# Altium PCB SiPM_Array_v3.PcbDoc
Units mm, origin at the board's own origin, x right, y up, seen from the top; angles counter-clockwise.
Board outline 25 x 28.2 mm, 2 copper layers (Top Layer, Bottom Layer); 15 components, 7 nets, 77 pads, 5 vias.
Unrouted connection lines stored in the file: 1.
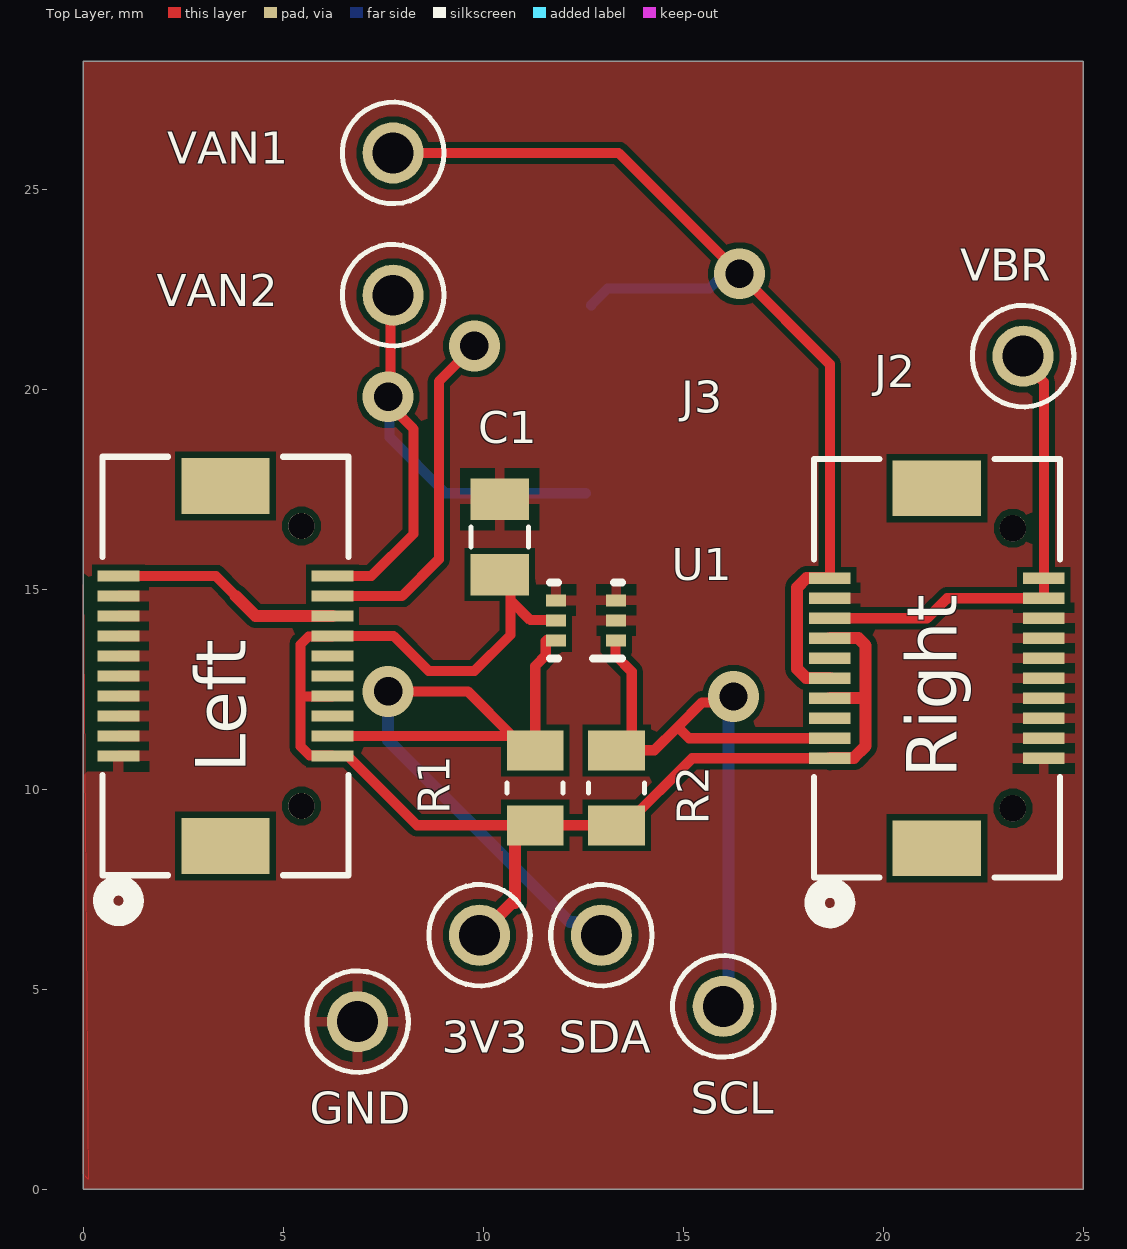
[diagram p0: Top Layer view]
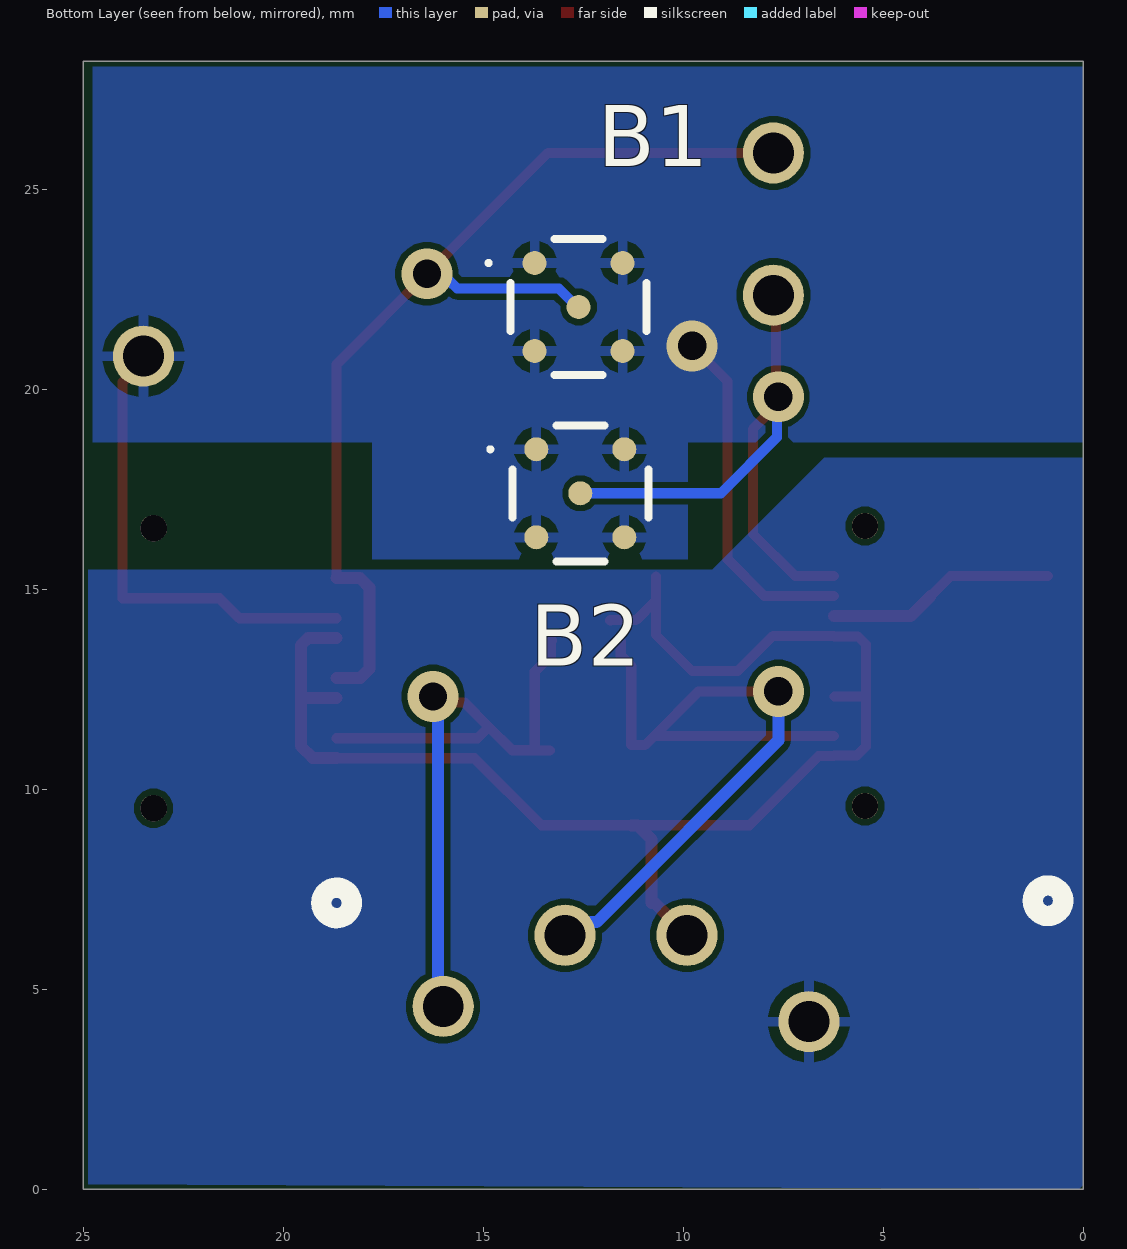
[diagram p1: Bottom Layer view, seen from below]
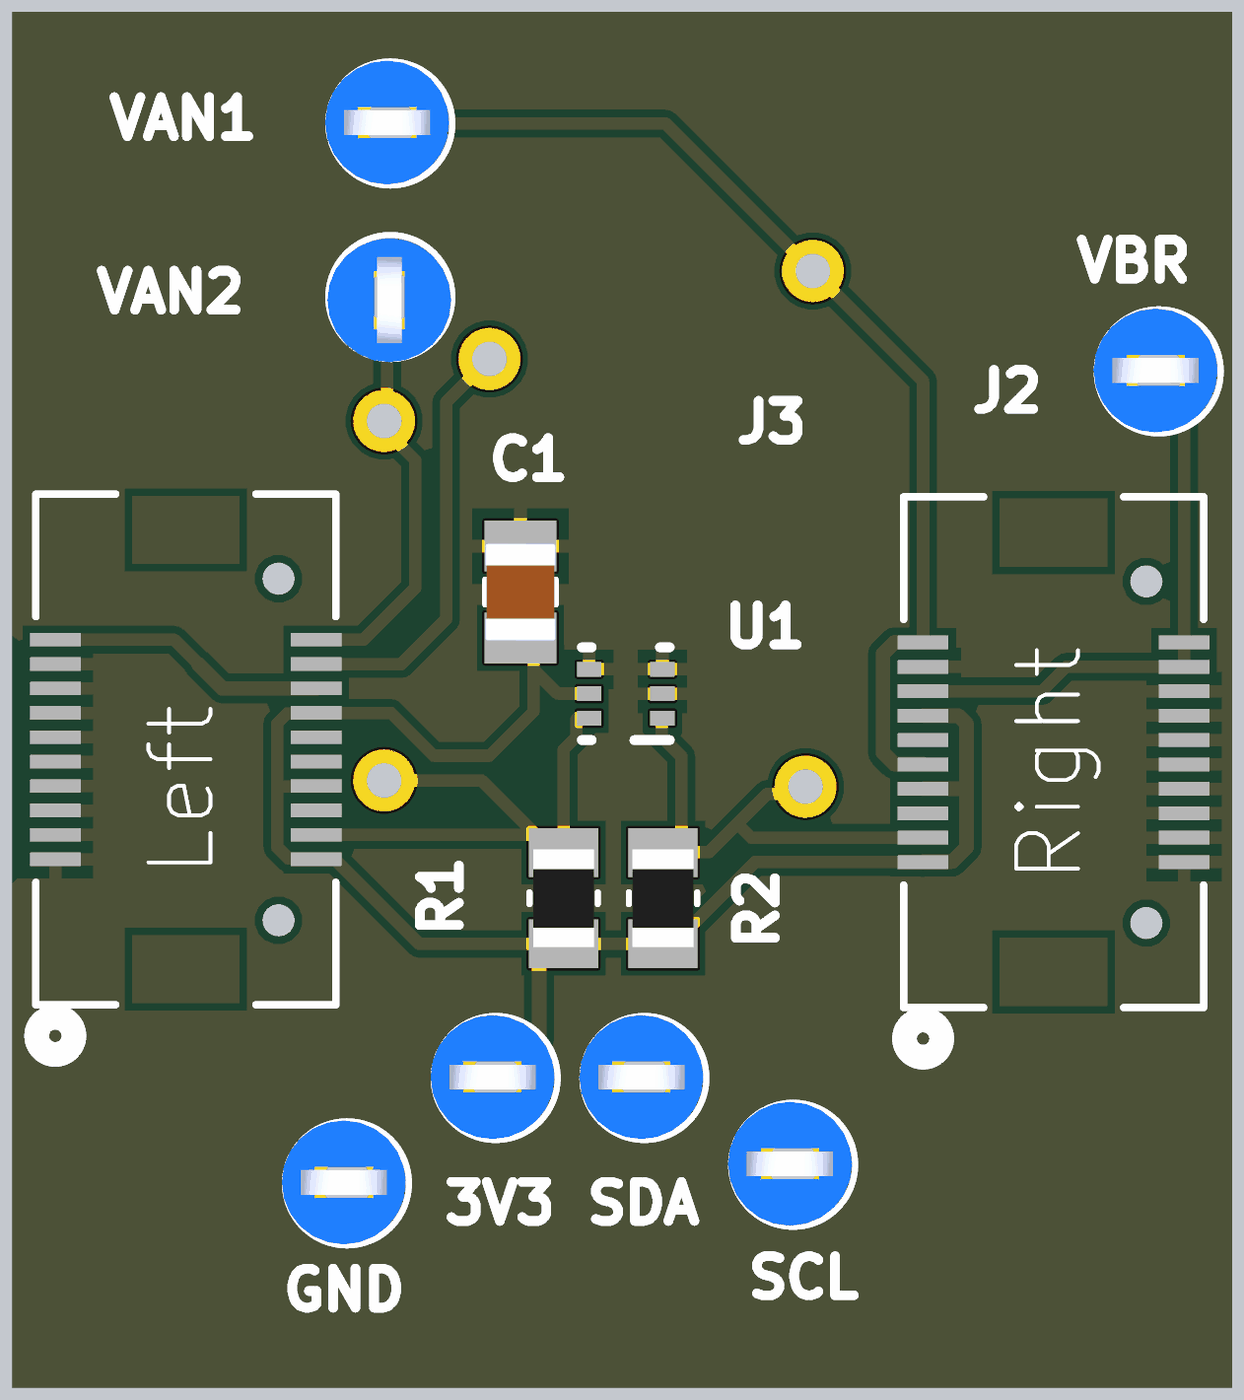
[diagram p2: 3D render of the assembled board from above, using the file's embedded part models]

## Layer stack, top to bottom
Top Solder: solder mask 0.0102, Solder Resist, Dk 3.5
Top Layer: signal copper 0.0356
Dielectric 1: dielectric 0.32, FR-4, Dk 4.8
Bottom Layer: signal copper 0.0356
Bottom Solder: solder mask 0.0102, Solder Resist, Dk 3.5

## Board outline
0,0 25,0 25,28.2 0,28.2

## Design rules (kind name [scope] priority, off if disabled: settings)
Clearance [All] p1: gap=0.152 ignorepadtopadclearanceinfootprint=FALSE
HoleSize [All] p1: absolutevalues=TRUE maxlimit=6.2 minlimit=0.3 maxpercent=80.000 minpercent=20.000
MinimumAnnularRing [All] p1: minimumring=0.15
MinimumSolderMaskSliver [All] p1: minsoldermaskwidth=0.1
PolygonConnect ViaConnect [IsVia] p1: connectstyle=Direct reliefconductorwidth=0.254 reliefentries=4 polygonreliefangle="90 Angle" airgapwidth=0.254
PolygonConnect [All] p2: connectstyle=Relief reliefconductorwidth=0.254 reliefentries=4 polygonreliefangle="90 Angle" airgapwidth=0.254
RoutingVias [All] p1: holewidth=0.3 width=0.6 viastyle="Through Hole" minholewidth=0.3 minwidth=0.5 maxholewidth=1 maxwidth=5
SilkToSilkClearance [All] p1: silktosilkclearance=0.1
SilkToSolderMaskClearance [IsPad] p1: minsilkscreentomaskgap=0.1 clearancetoexposedcopper=TRUE
SolderMaskExpansion [All] p1: expansion=0.051 istentingtop=FALSE
SupplyNets "Schematic Supply Nets_6" [InNet('GND')] p1: voltage=0.000
SupplyNets "Schematic Supply Nets_5" [InNet('3V3')] p2: voltage=0.000
SupplyNets "Schematic Supply Nets_4" [InNet('VBR')] p3: voltage=0.000
SupplyNets "Schematic Supply Nets_3" [InNet('SCL')] p4: voltage=0.000
SupplyNets "Schematic Supply Nets_2" [InNet('VAN1')] p5: voltage=0.000
SupplyNets "Schematic Supply Nets_1" [InNet('VAN2')] p6: voltage=0.000
SupplyNets "Schematic Supply Nets" [InNet('SDA')] p7: voltage=0.000
Width [All] p1: maxlimit=25.4 minlimit=0.15 preferedwidth=0.3
26 further rules are at their usual default settings.

## Components (designator, comment, footprint, x,y, rotation, side; value= is the part's Value field where it differs from the comment)
3V3 "5267" KEYSTONE_5267 9.906,6.35 r0 top
B1 "S14160-3050HS" S141603050HS 12.616,22.055 r180 bottom
B2 "S14160-3050HS" S141603050HS 12.573,17.399 r180 bottom
C1 "100uF" CAPACITOR_0805_2012M-70N 10.414,16.307 r270 top
GND "5267" KEYSTONE_5267 6.858,4.191 r0 top
J2 "DF17(3.0)-20DS-0.5V(57)" CONN_DF173.0-20DS-0.5V57_HIR 21.341,13.025 r90 top
J3 "DF17(3.0)-20DS-0.5V(57)" CONN_DF173.0-20DS-0.5V57_HIR 3.556,13.081 r90 top
R1 "CR0805-FX-2001ELF" RESC2012X60N 11.299,10.033 r90 top
R2 "CR0805-FX-2001ELF" RESC2012X60N 13.335,10.033 r90 top
SCL "5267" KEYSTONE_5267 16.002,4.572 r0 top
SDA "5267" KEYSTONE_5267 12.954,6.35 r0 top
U1 "TMP112AQDRLRQ1" DRL0006A 12.573,14.224 r180 top
VAN1 "5267" KEYSTONE_5267 7.747,25.908 r0 top
VAN2 "5267" KEYSTONE_5267 7.747,22.352 r90 top
VBR "5267" KEYSTONE_5267 23.495,20.828 r0 top

## Footprints (in the part's own frame and the unit in brackets; to place one, negate y for a bottom-side part, rotate by r counter-clockwise, add the part's x,y. Pads: shape width x height; smd on the part's side, far side on the other; paste and mask are expansions set on the pad)
CAPACITOR_0805_2012M-70N [mm] "Capacitor, 0805 (2012 metric), 0.7mm high, nominal pads,"
  rect 1.04x1.47 smd mask+0.051: 1(-0.94,0) 2(0.94,0)
  silkscreen extent -0.25,-0.72 0.25,0.72, body extent -1,-0.73 1,0.73, height 1.23
CONN_DF173.0-20DS-0.5V57_HIR [mil]
  rect 11x41 smd paste+0 mask+0: 1(-88.58,105.31) 2(-88.58,-105.31) 3(-68.9,105.31) 4(-68.9,-105.31) 5(-49.21,105.31) 6(-49.21,-105.31) 7(-29.53,105.31) 8(-29.53,-105.31) 9(-9.84,105.31) 10(-9.84,-105.31) 11(9.84,105.31) 12(9.84,-105.31) 13(29.53,105.31) 14(29.53,-105.31) 15(49.21,105.31) 16(49.21,-105.31) 17(68.9,105.31) 18(68.9,-105.31) 19(88.58,105.31) 20(88.58,-105.31)
  rect 55x87 smd paste-43.5 mask-43.5: 21(-177.17,0) 22(177.17,0)
  round 26 / inner round 60 / far side round 26 hole 26 unplated paste-99999 mask+0: 23(-137.8,-74.8) 24(137.8,-74.8)
  silkscreen extent -246,-121 206,121
DRL0006A [mm]
  rect 0.5x0.3 smd paste+0 mask+0.051: 1(-0.75,0.5) 2(-0.75,0) 3(-0.75,-0.5) 4(0.75,-0.5) 5(0.75,0) 6(0.75,0.5)
  silkscreen extent -0.9,-0.95 0.9,0.95
KEYSTONE_5267 [mm]
  round 1.53 hole 1.02: TP(0,0)
  silkscreen extent -1.27,-1.27 1.27,1.27, body extent -1.33,-1.24 1.2,1.29, height 3.17
RESC2012X60N [mm]
  rect 1x1.42 smd: 1(-0.935,0) 2(0.935,0)
  silkscreen extent -0.12,-0.7 0.12,0.7, body extent -1,-0.63 1,0.63, height 0.6
S141603050HS [mm]
  round 0.6 smd: A1(-1.1,1.1) A3(-1.1,-1.1) B2(0,0) C1(1.1,1.1) C3(1.1,-1.1)
  silkscreen extent -2.3,-1.7 1.7,1.7

## Part data
3V3 GND SCL SDA VAN1 VAN2 VBR: "TEST POINT (BLUE) - MINIATURE", Package=None, Check_prices=https://www.snapeda.com/parts/5267/Keystone/view-part/?ref=eda, MF="Keystone Electronics", MP=5267, SnapEDA_Link=https://www.snapeda.com/parts/5267/Keystone/view-part/?ref=snap
B1 B2: "The S14160 series achieve higher PDE (photon detection efficiency) and lower operation voltage than other MPPC to adapt for PET and radiation monitor application.-Higher PDE: 50% at p, Vop=VBR + 2.7 V", Manufacturer_Name=Hamamatsu, Datasheet Link=https://www.hamamatsu.com/content/dam/hamamatsu-photonics/sites/documents/99_SALES_LIBRARY/ssd/s14160_s14161_series_kapd1064e.pdf, Geometry.Height=1.55mm, Manufacturer_Part_Number=S14160-3050HS
C1: library part GRM21BR60J107ME15L, "Passive - Capacitor, 0805, 100uF Max, X5R, 6.3V ±20%, -55°C ~ 85°C, 0805 (2012 Metric). 20uF @ 6.3V", Capacitance at Rated Voltage=20%, Package=0805, Rated Voltage=6.3V, Supplier 1 Part No.=490-GRM155R61E225KE11JCT-ND, Temp Range="-55°C ~ 85°C", Temperature Coefficient=X5R, Tolerance=±20%, APSS Standard Part="APSS Standard", MF Part No.=GRM21BR60J107ME15L, Supplier 1=Digikey
J2 J3: library part DF173.0-20DS-0.5V57, "Description", Manufacturer_Name=Hirose, Copyright="Copyright (C) 2025 Ultra Librarian. All rights reserved.", Manufacturer_Part_Number=DF17(3.0)-20DS-0.5V(57), RefDes=RefDes, Type=Type
R1 R2: "Res 0805 2k 1% 125mW", Package="0805 Bourns", Check_prices=https://www.snapeda.com/parts/CR0805-FX-2001ELF/Bourns/view-part/?ref=eda, MF=Bourns, MP=CR0805-FX-2001ELF, SnapEDA_Link=https://www.snapeda.com/parts/CR0805-FX-2001ELF/Bourns/view-part/?ref=snap
U1: "No Description Available", Manufacturer="Texas Instruments", CompType=IC, Mfr_Name="Texas Instruments", MountType=SMT, PackageReference=DRL0006A, PartNumber=TMP112AQDRLRQ1, RefDes=RefDes, RoHS=Y, Type=TYPE

## Via types
v1: diameter 1.27, hole 0.711, Top Layer to Bottom Layer, 5 vias

## Nets (pads, with @x,y where several pads share a name; then routed paths per layer and width w, separated by ;. In a path a pad name is that pad's centre, name@x,y a point inside that pad or via, vN(x,y) a via of type N, cw(c..) or ccw(c..) an arc to the next point about the centre after c; other vN are vias at no path point)
3V3: 3V3.TP C1.2 J2.1 J2.7 J2.13 J3.2 J3.8 J3.14 R1.1 R2.1 U1.5 | length 35.7
  Top Layer w0.254: J3.8@6.219,12.319 5.453,12.319 5.431,12.296 ; C1.2@10.681,15.315 10.681,13.856 9.779,12.954 8.636,12.954 7.759,13.831 J3.14 6.218,13.818 5.632,13.818 5.431,13.617 5.431,12.296 ; 10.708,14.698 11.179,14.227 11.82,14.227 U1.5 ; R1.1@11.168,9.098 11.145,9.098 8.345,9.098 6.612,10.831 J3.2 6.218,10.844 5.663,10.844 5.431,11.076 5.431,12.296 ; R1.1 R2.1 13.545,9.098 15.222,10.775 J2.1
  Top Layer w0.3: 3V3.TP 10.713,7.157 10.795,7.157 10.795,8.748 R1.1@11.145,9.098 ; R1.1@11.168,9.098 R1.1 ; J2.1 18.676,10.785 19.264,10.785 19.558,11.079 19.558,12.339 ; J2.7 19.494,12.275 19.558,12.339 ; J2.13 19.382,13.775 19.558,13.599 19.558,12.339
GND: C1.1 GND.TP J2.2 J2.4 J2.6 J2.8 J2.10 J2.12 J2.14 J2.16 J2.17 J3.1 J3.3 J3.5 J3.7 J3.9 J3.11 J3.13 J3.15 J3.17 U1.2 U1.3 U1.4
SCL: J2.3 R2.2 SCL.TP U1.1 | length 18.2
  Top Layer w0.254: U1.1@13.28,13.724 13.283,13.724 13.306,13.701 13.306,13.342 13.712,12.935 R2.2@13.712,10.968 ; R2.2 R2.2@13.712,10.968 ; v1(16.256,12.319) 16.109,12.172 15.474,12.172 14.86,11.558 ; J2.3 15.142,11.275 14.86,11.558 ; R2.2@13.712,10.968 13.719,10.975 14.277,10.975 14.86,11.558
  Bottom Layer w0.3: SCL.TP 16.129,4.699 16.129,12.192 v1(16.256,12.319)
SDA: J3.4 R1.2 SDA.TP U1.6 | length 20.1
  Top Layer w0.254: J3.4 R1.2@10.726,11.331 ; v1(7.62,12.446) 9.611,12.446 R1.2@10.726,11.331 ; U1.6@11.604,13.724 11.587,13.724 11.564,13.701 11.564,13.346 11.299,13.081 11.299,11.103 10.954,11.103 R1.2@10.726,11.331
  Bottom Layer w0.3: v1(7.62,12.446) 7.62,11.223 12.164,6.679 12.293,6.679 12.621,6.35 SDA.TP
VAN1: B1.B2 J2.9 J2.19 VAN1.TP | length 26.4
  Top Layer w0.254: VAN1.TP 13.384,25.908 v1(16.406,22.885) 18.666,20.626 J2.19
  Top Layer w0.3: J2.9 18.656,12.785 18.068,12.785 17.843,13.01 17.843,15.04 18.078,15.275 J2.19
  Bottom Layer w0.254: B1.B2@12.7,22.098 12.7,22.107 13.114,22.52 15.653,22.52 15.823,22.691 16.212,22.691 v1(16.406,22.885)
VAN2: B2.B2 J3.20 VAN2.TP | length 15.3
  Top Layer w0.254: J3.20 7.203,15.331 8.255,16.383 8.255,19.01 7.62,19.645 v1(7.62,19.812) 7.683,19.875 7.683,22.288 VAN2.TP
  Bottom Layer w0.254: v1(7.62,19.812) 7.66,19.772 7.66,18.796 9.057,17.399 B2.B2
VBR: B1.A1 B1.A3 B1.C1 B1.C3 B2.A1 B2.A3 B2.C1 B2.C3 J2.15 J2.18 J2.20 J3.16 J3.18 J3.19 VBR.TP | length 26.3
  Top Layer w0.254: J3.19 3.312,15.331 3.812,14.831 ; J3.18 7.973,14.831 8.89,15.748 8.89,20.193 v1(9.779,21.082) ; J2.15 21.097,14.275 21.597,14.775 J2.18 J2.20 24.016,20.18 VBR.TP@23.431,20.764
  Top Layer w0.3: 3.812,14.831 4.312,14.331 J3.16
pads on no net: J2.5 J2.11 J2.21 J2.22 J2.23 J2.24 J3.6 J3.10 J3.12 J3.21 J3.22 J3.23 J3.24

## Polygon pours and split planes (outlines as drawn)
GND on Bottom Layer "GND_L02_P007" (solid, pour order 7): 0,0 0,18.287 6.477,18.287 9.271,15.493 24.873,15.493 24.873,0.13
VBR on Bottom Layer "VBR_L02_P004" (solid, pour order 4): 9.89,18.669 9.89,15.748 17.78,15.748 17.78,18.669 24.765,18.669 24.765,28.067 0,28.067 0,18.669 8.382,18.669
no net on Top Layer "NONET_L01_P005" (solid, pour order 5): 0.127,0.254 0,0.381 0,15.113
GND on Top Layer "GND_L01_P003" (solid, pour order 3): 0,0 0,28.2 25,28.2 25,0

## Silkscreen, mask and mechanical layers (free items; w line width, h text height)
Mechanical 1:
  the board outline again, w0.254

## Text inside footprints (layer, text, board x,y; h text height)
J2: Top Overlay "Right" at 21.844,10.287 h1.27 r90
J3: Top Overlay "Left" at 4.064,10.414 h1.27 r90